# Altium PCB Using xSignals in a High-Speed Design with Diff Pair.PcbDoc
Units mm, origin at the board's own origin, x right, y up, seen from the top; angles counter-clockwise.
Board outline 63.5 x 50.8 mm, 4 copper layers (Top Layer, Internal Plane 1, Mid-Layer 2, Bottom Layer), stack 1.57 mm thick; 9 components, 11 nets, 56 pads, 6 vias.
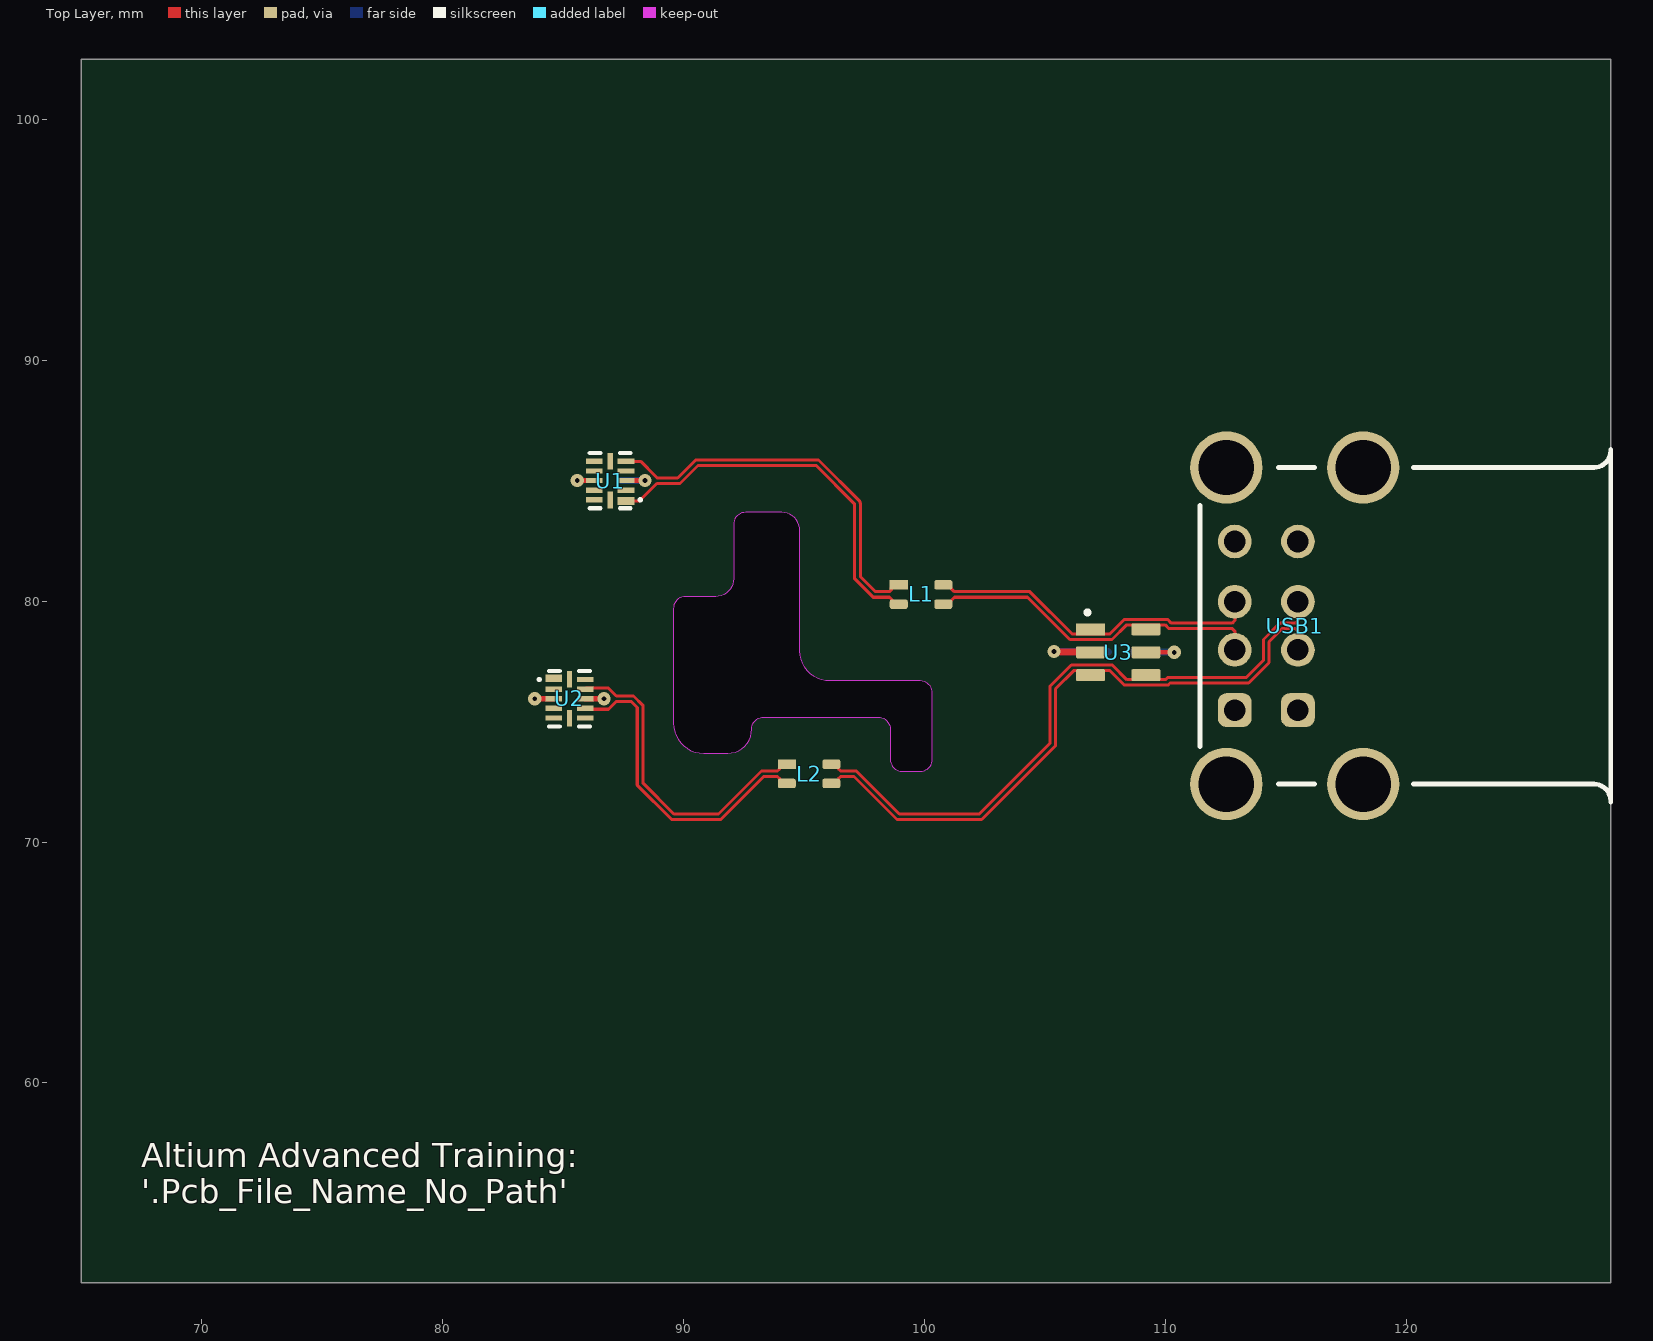
[diagram p0: Top Layer view]
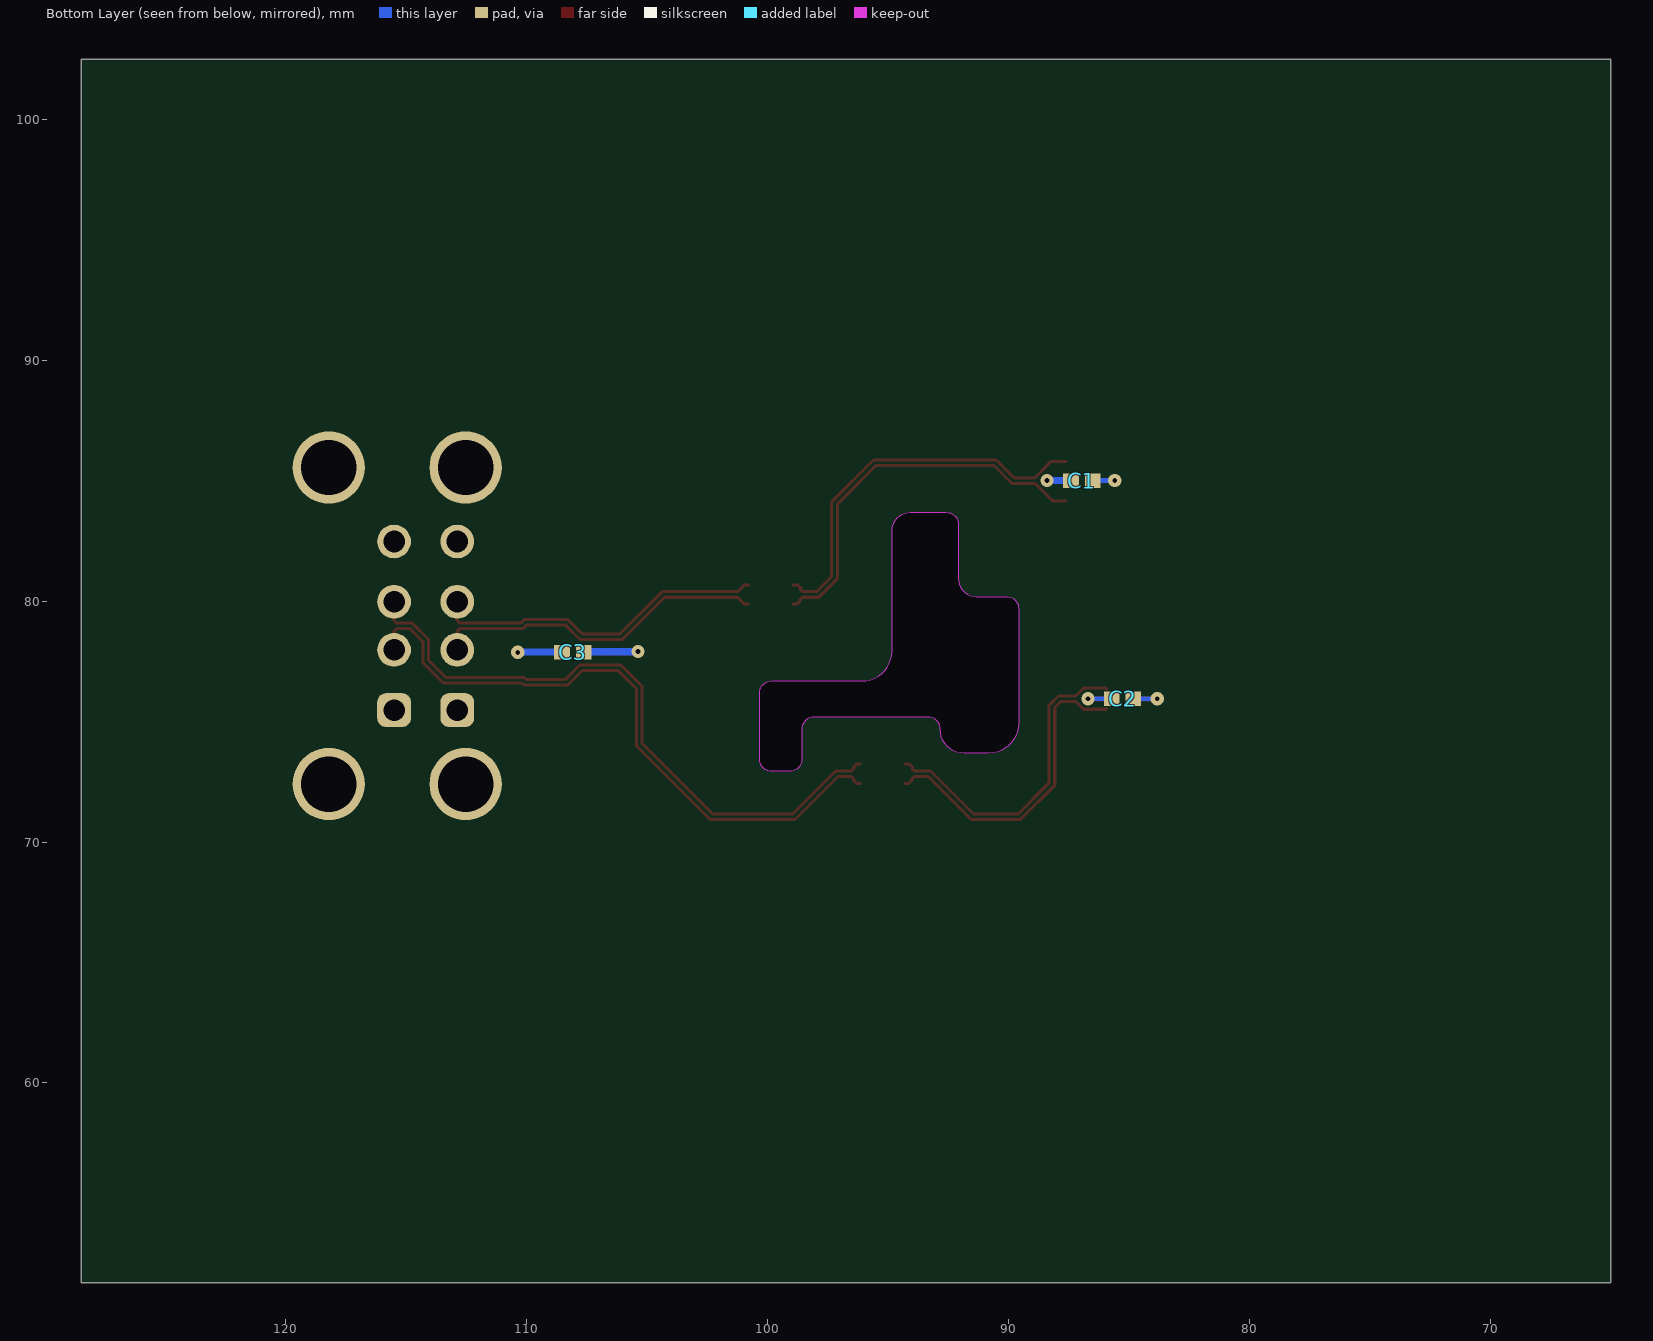
[diagram p1: Bottom Layer view, seen from below]
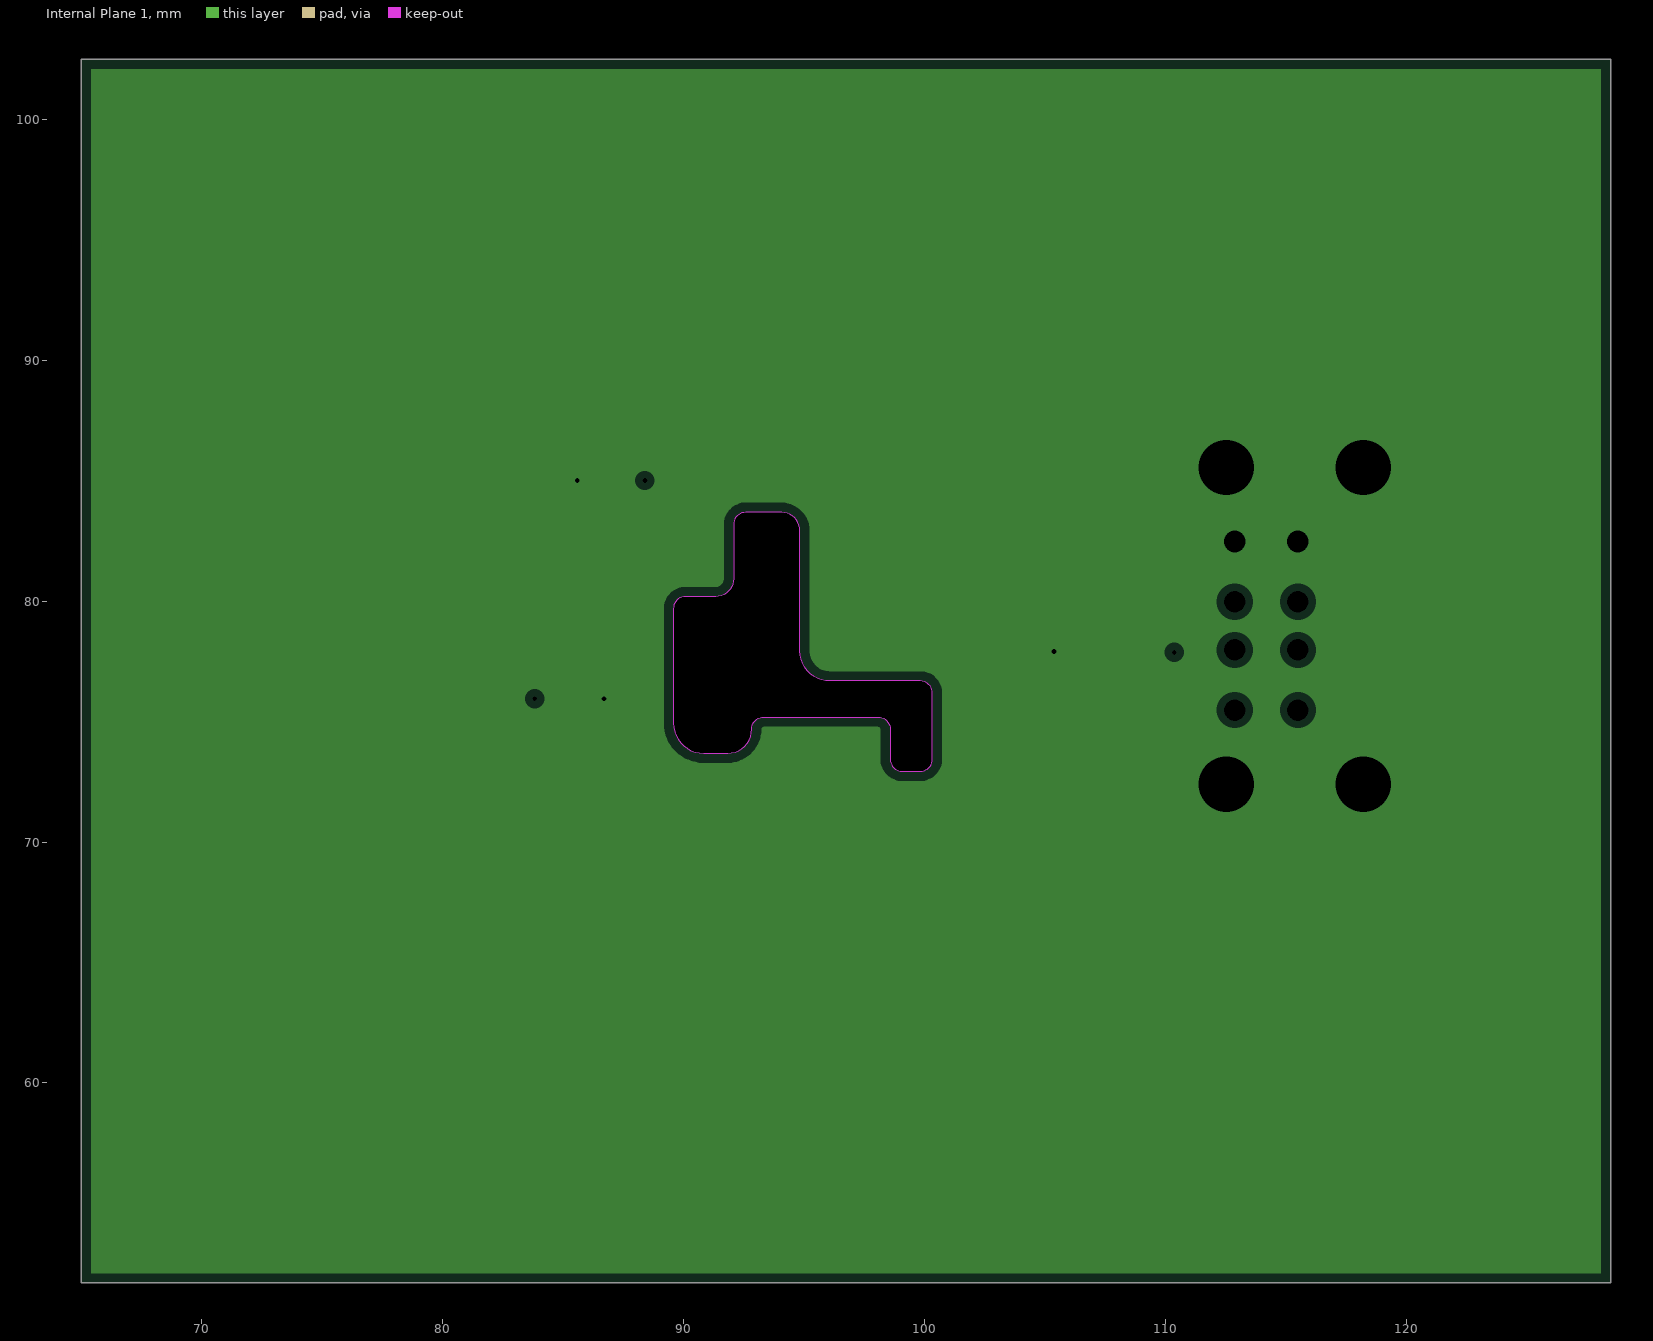
[diagram p2: Internal Plane 1, clearances drawn from the general rule]
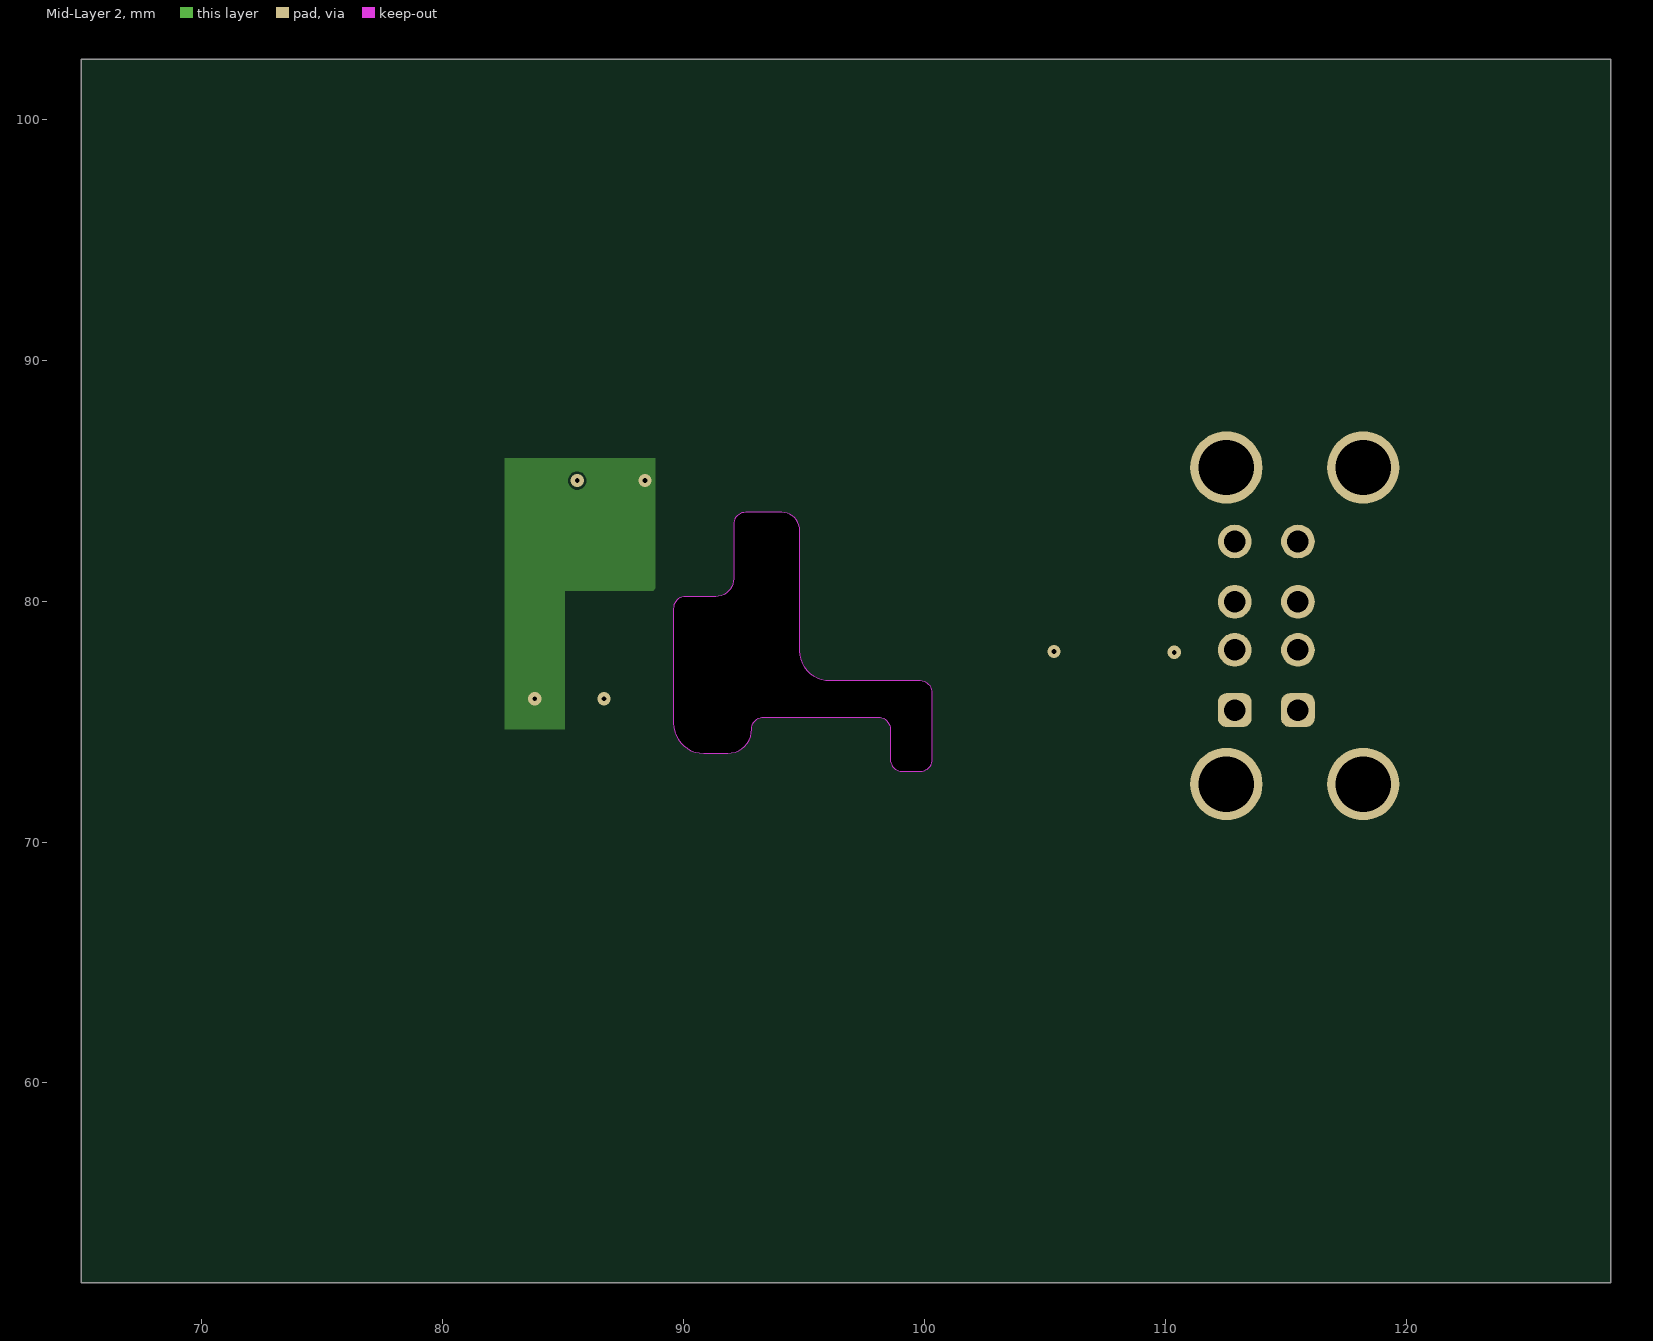
[diagram p3: Mid-Layer 2]

## Layer stack, top to bottom
Top Solder: solder mask 0.02, Solder Resist, Dk 2.5
Top Layer: signal copper 0.044
Dielectric  1: core 0.108, FR-4 (1 x 2116), Dk 3.6
Internal Plane 1: plane copper 0.033, net GND
Dielectric 2: prepreg 1.2, FR-4, Dk 4.2
Mid-Layer 2: signal copper 0.033
Dielectric  3: core 0.108, FR-4 (1 x 2116), Dk 3.6
Bottom Layer: signal copper 0.044
Bottom Solder: solder mask 0.02, Solder Resist, Dk 2.5

## Board outline
65,51.7 128.5,51.7 128.5,102.5 65,102.5
cut-out: 92.585,83.687 ccw(c92.585,83.187) 92.085,83.187 92.085,80.937 cw(c91.335,80.937) 91.335,80.187 90.085,80.187 ccw(c90.085,79.687) 89.585,79.687 89.585,74.937 ccw(c90.835,74.937) 90.835,73.687 91.835,73.687 ccw(c91.835,74.687) 92.835,74.687 cw(c93.335,74.687) 93.335,75.187 98.085,75.187 cw(c98.085,74.687) 98.585,74.687 98.585,73.437 ccw(c99.085,73.437) 99.085,72.937 99.835,72.937 ccw(c99.835,73.437) 100.335,73.437 100.335,76.187 ccw(c99.835,76.187) 99.835,76.687 96.085,76.687 cw(c96.085,77.937) 94.835,77.937 94.835,82.937 ccw(c94.085,82.937) 94.085,83.687

## Design rules (kind name [scope] priority, off if disabled: settings)
Clearance Clearance_DDR_GND_Polygons [IsRegion AND InNet ('GND') vs (IsRegion Or IsTrack or IsArc or IsVia) AND (InNetClass('DDR_ALL'))] p1: gap=0.508 ignorepadtopadclearanceinfootprint=FALSE except(0: Arc-Hole Track-Hole SMDPad-Hole THPad-Hole Via-Hole Fill-Hole Poly-Hole Region-Hole Text-Hole)
Clearance "Clearance_DiffPair Separation_GND planes" [(InDifferentialPairClass('All Differential Pairs')) and (not IsVia) vs IsRegion AND InNET('GND')] p2: gap=0.508 ignorepadtopadclearanceinfootprint=FALSE except(0: Arc-Hole Track-Hole SMDPad-Hole THPad-Hole Via-Hole Fill-Hole Poly-Hole Region-Hole Text-Hole)
Clearance Clearance_Keep_Out [OnLayer('Keep-Out Layer')] p3: gap=0.5 ignorepadtopadclearanceinfootprint=FALSE except(0: Arc-Hole Track-Hole SMDPad-Hole THPad-Hole Via-Hole Fill-Hole Poly-Hole Region-Hole Text-Hole)
Clearance Clearance_Fiducials [HasFootprint('FIDUCIAL_0.8MM')] p4: gap=0.4 ignorepadtopadclearanceinfootprint=FALSE except(0: Arc-Hole Track-Hole SMDPad-Hole THPad-Hole Via-Hole Fill-Hole Poly-Hole Region-Hole Text-Hole)
Clearance "Clearance_DiffPair Separation" [(InDifferentialPairClass('All Differential Pairs'))] p5: gap=0.38 ignorepadtopadclearanceinfootprint=FALSE except(0: Arc-Hole Track-Hole SMDPad-Hole THPad-Hole Via-Hole Fill-Hole Poly-Hole Region-Hole Text-Hole)
Clearance Clearance_NPTH [(ObjectKind = 'Pad') And (Layer = 'MultiLayer') And (Net = 'No Net') And (PadIsPlated = 'False')] p6: gap=0.3 ignorepadtopadclearanceinfootprint=FALSE except(0: Arc-Hole Track-Hole SMDPad-Hole THPad-Hole Via-Hole Fill-Hole Poly-Hole Region-Hole Text-Hole) // This is all the NPTH
Clearance Clearance_Polys [IsRegion vs IsRegion Or IsTrack or IsArc or IsPad or IsFill] p7: gap=0.2 ignorepadtopadclearanceinfootprint=FALSE except(0: Arc-Hole Track-Hole SMDPad-Hole THPad-Hole Via-Hole Fill-Hole Poly-Hole Region-Hole Text-Hole)
Clearance Clearance_Pads_DPs [(InDifferentialPairClass('All Differential Pairs')) vs (IsPad AND HasFootprint('UQFN12')) or (IsPad AND HasFootprint('ACM2012')) or (IsPad AND HasFootprint('DISPLAYPORT_SOCKET_MOLEX')) or (IsPad AND HasFootprint('QFN50P300X300X50-16N'))or (IsPad AND HasFootprint('CC0402')) or (IsPad AND HasFootprint('RC0402')) or (IsPad AND HasFootprint('SSOP28')) or (IsPad AND HasFootprint('SOT23-6L')) or (IsPad AND HasFootprint('SOCKET-BGA400-SG-BGA-6052'))] p8: gap=0.1 ignorepadtopadclearanceinfootprint=FALSE except(0: Arc-Hole Track-Hole SMDPad-Hole THPad-Hole Via-Hole Fill-Hole Poly-Hole Region-Hole Text-Hole)
Clearance Clearance_1 [All] p9: gap=0.1 ignorepadtopadclearanceinfootprint=FALSE except(0: Arc-Hole Track-Hole SMDPad-Hole THPad-Hole Via-Hole Fill-Hole Poly-Hole Region-Hole Text-Hole)
Clearance "Clearance same net" [All vs IsVia Or IsPad] p10 off: gap=0.1 ignorepadtopadclearanceinfootprint=FALSE except(0: Arc-Hole Track-Hole SMDPad-Hole THPad-Hole Via-Hole Fill-Hole Poly-Hole Region-Hole Text-Hole)
ComponentClearance ComponentClearance_TP [HasFootprint('TESTPAD_1270um') vs HasFootprint('TESTPAD_1270um')] p1: gap=0.64 collisioncheckmode=3 verticalgap=4 showdistances=FALSE // Based on 1.91mm between centres on the RA2R coda systems receptacle and test probes (PA2 series)
ComponentClearance ComponentClearance_RJ45 [(ObjectKind = 'Component') And (Footprint = 'RJ45_TRJG16368CNL') vs (ObjectKind = 'Component') And (Footprint = 'SFP_CAGE_SINGLE_Rev2')] p2: gap=0 collisioncheckmode=3 verticalgap=0 showdistances=FALSE
ComponentClearance [All] p3: gap=0.2 collisioncheckmode=3 verticalgap=0.2 showdistances=FALSE
DiffPairsRouting DiffPairsRouting_90R [InDifferentialPairClass('USB')] p1: maxlimit=0.127 minlimit=0.102 mostfreqgap=0.127 toplayer_maxgap=0.102 toplayer_prefgap=0.102 toplayer_minwidth=0.127 toplayer_maxwidth=0.127 toplayer_prefwidth=0.127 midlayer2_mingap=0.127 midlayer2_minwidth=0.097 midlayer2_maxwidth=0.097 midlayer2_prefwidth=0.097 bottomlayer_maxgap=0.102 bottomlayer_prefgap=0.102 bottomlayer_minwidth=0.127 bottomlayer_maxwidth=0.127 bottomlayer_prefwidth=0.127 impedanceprofiledriven=TRUE impedanceprofileid={3A565A69-9CC7-4088-950E-674C5BDB7BBF} impedanceprofilevalue=90.000000 maxuncoupledlength=20
HoleSize [All] p1: absolutevalues=TRUE maxlimit=3.2 minlimit=0.15 maxpercent=80.000 minpercent=20.000
HoleToHoleClearance HoleToHoleVia0.45mm [(ObjectKind = 'Via') AND (AsMM(ViaDiameter) = 0.45) AND (AsMM(HoleDiameter) = 0.2)] p1: gap=0.35 allowstackedmicrovias=FALSE
HoleToHoleClearance "HoleToHoleVia 0.55mm" [(ObjectKind = 'Via') AND (AsMM(ViaDiameter) = 0.55) AND (AsMM(HoleDiameter) = 0.25)] p2: gap=0.4 allowstackedmicrovias=FALSE
HoleToHoleClearance "HoleToHoleVia 0.406" [(ObjectKind = 'Via') AND (AsMM(ViaDiameter) = 0.406) AND (AsMM(HoleDiameter) = 0.20)] p3: gap=0.306 allowstackedmicrovias=FALSE
HoleToHoleClearance [All] p4: gap=0.254 allowstackedmicrovias=TRUE
MatchedLengths MatchedLengths_GROUP [InxSignalClass('USB_All')] p1: tolerance=1 checknetsindiffpair=FALSE checkdiffpairvsdiffpair=TRUE checkxsignals=TRUE checkothers=TRUE
MatchedLengths "MatchedLengths _All _Diff_Pairs" [InxSignalClass('USB_All')] p2: tolerance=0.1 checknetsindiffpair=TRUE checkdiffpairvsdiffpair=FALSE checkxsignals=FALSE checkothers=FALSE
MatchedLengths "Schematic Matched Net Lengths" [InNetClass('90R_DIFF')] p3: tolerance=0.1 checknetsindiffpair=TRUE checkdiffpairvsdiffpair=FALSE checkxsignals=FALSE checkothers=FALSE
MinimumAnnularRing MinimumAnnularRing_1 [All] p1 off: minimumring=0.124
MinimumAnnularRing [All] p2 off: minimumring=0.175
MinimumSolderMaskSliver "MinimumSolderMaskSliver_Text to pads" [IsPad vs IsText] p1: minsoldermaskwidth=0.07
MinimumSolderMaskSliver MinimumSolderMaskSliver_Vias [All vs IsVIA] p2: minsoldermaskwidth=0.07
MinimumSolderMaskSliver [All] p3 off: minsoldermaskwidth=0.07
PlaneClearance PlaneClearance_1 [(ObjectKind = 'Pad') And (Layer = 'MultiLayer') And (Net = 'No Net') And (PadIsPlated = 'False')] p1: clearance=0.3
PlaneClearance [All] p2: clearance=0.3 // Email ChrisM for Wurth 07-07-2014 300um min (or 275 if not poss) - was 225 before
PlaneConnect "PlaneConnect on SFP age with islated copper" [(InComponent('CAGE1') AND ((ObjectKind = 'Pad') And (Rotation = '0.001')))] p1: planeconnectstyle=Direct reliefexpansion=0.508 reliefentries=4 reliefconductorwidth=0.254 reliefairgap=0.254
PlaneConnect PlaneConnect_VIAs [IsVia] p2: planeconnectstyle=Direct reliefexpansion=0.508 reliefentries=4 reliefconductorwidth=0.254 reliefairgap=0.254
PlaneConnect PlaneConnect_1 [All] p3: planeconnectstyle=Relief reliefexpansion=0.5 reliefentries=4 reliefconductorwidth=0.25 reliefairgap=0.25
PolygonConnect PolygonConnect_Vias [IsVia] p1: connectstyle=Direct reliefconductorwidth=0.254 reliefentries=4 polygonreliefangle="90 Angle" airgapwidth=0.254
PolygonConnect [(ObjectKind = 'Pad') And (Layer = 'MultiLayer')] p2: connectstyle=Relief reliefconductorwidth=0.254 reliefentries=4 polygonreliefangle="90 Angle" airgapwidth=0.254
PolygonConnect PolygonConnect_1 [All] p3: connectstyle=Direct reliefconductorwidth=0.254 reliefentries=4 polygonreliefangle="90 Angle" airgapwidth=0.254
RoutingVias [All] p1: holewidth=0.2 width=0.45 viastyle="Through Hole" minholewidth=0.2 minwidth=0.406 maxholewidth=0.5 maxwidth=0.8
SilkToSilkClearance [All] p1 off: silktosilkclearance=0.1
SilkToSolderMaskClearance [IsPad] p1 off: minsilkscreentomaskgap=0.1 clearancetoexposedcopper=TRUE
SolderMaskExpansion "SolderMaskExpansion_IsVia 0.45mm" [(ObjectKind = 'Via') And (AsMM(ViaDiameter) = 0.45) And (AsMM(HoleDiameter) = 0.2)] p1: expansion=-0.125 istentingtop=FALSE // 0.45 pad size Vias with 0.2mm drill
SolderMaskExpansion "SolderMaskExpansion_IsVia 0.55mm" [(ObjectKind = 'Via') And (AsMM(ViaDiameter) = 0.55)  And (AsMM(HoleDiameter) = 0.25)] p2: expansion=-0.15 istentingtop=FALSE // 0.55 pad size Vias with 0.25mm drill
SolderMaskExpansion "SolderMaskExpansion_IsVia 0.55mm_0.2mmhole" [(ObjectKind = 'Via') And (AsMM(ViaDiameter) = 0.55)  And (AsMM(HoleDiameter) = 0.20)] p3: expansion=-0.175 istentingtop=FALSE // 0.55 pad size Vias with 0.25mm drill
SolderMaskExpansion SolderMaskExpansion_IsVia_0.406mm [(ObjectKind = 'Via') And (AsMM(ViaDiameter) = 0.406) And (AsMM(HoleDiameter) = 0.2)] p4: expansion=-0.103 istentingtop=FALSE // 0.45 pad size Vias with 0.2mm drill
SolderMaskExpansion [All] p5: expansion=0 istentingtop=FALSE // Need to set to 0 on Gerber generation (else 0.7mm is wurths rule)
SolderMaskExpansion SolderMaskExpansion_1 [All] p6: expansion=0.07 istentingtop=FALSE // Need to set to 0 on Gerber generation (else 0.7mm is wurths rule)
Width Width_90R_100R [InNetClass('100R_DIFF') OR InNetClass('90R_DIFF')] p1: maxlimit=0.127 minlimit=0.127 preferedwidth=0.127
Width [All] p2: maxlimit=3 minlimit=0.127 preferedwidth=0.2 minimp=0.000000 maximp=0.000000 favimp=0.000000
21 further rules are at their usual default settings.

## Classes and differential pairs
differential pair class USB: D1 D2 J_D1 J_D2
net class 90R_DIFF: D1_N D1_P D2_N D2_P J_D1_N J_D1_P J_D2_N J_D2_P
differential pair J_D2: +J_D2_P -J_D2_N
differential pair J_D1: +J_D1_P -J_D1_N
differential pair D2: +D2_P -D2_N
differential pair D1: +D1_P -D1_N

## Components (designator, comment, footprint, x,y, rotation, side; value= is the part's Value field where it differs from the comment)
C1 "100nF" CC0402 86.961,85.007 r0 bottom
C2 "100nF" CC0402 85.269,75.949 r180 bottom
C3 "100nF" CC0402 108.087,77.888 r180 bottom
L1 "90R@100MHz" ACM2012 99.865,80.278 r0 top
L2 "90R@100MHz" ACM2012 95.218,72.835 r0 top
U1 "NCN1154" UQFN12 86.961,85.007 r90 top
U2 "NCN1154" UQFN12 85.269,75.949 r270 top
U3 "DVIULC6-4SC6" SOT23-6L 106.9,78.828 r270 top
USB1 "DUAL USB" USB-A_RA_DUAL 128.5,78.978 r90 top

## Footprints (in the part's own frame and the unit in brackets; to place one, negate y for a bottom-side part, rotate by r counter-clockwise, add the part's x,y. Pads: shape width x height; smd on the part's side, far side on the other; paste and mask are expansions set on the pad)
ACM2012 [mm] "Common Mode Choke 0805 package"
  rect 0.75x0.4 smd: 1(-0.925,0.4)
  rrect50% 0.75x0.4 smd: 2(-0.925,-0.4) 3(0.925,-0.4) 4(0.925,0.4)
  body extent -1.1,-0.7 1.1,0.7, height 1.3
CC0402 [mm] "Standard 0402 Capacitor 0.5mm thick"
  rect 0.65x0.6 smd: 1(-0.45,0) 2(0.45,0)
  body extent -0.53,-0.28 0.53,0.28, height 0.51
SOT23-6L [mm]
  rect 0.5x1.2 smd: 1(0,0)
  rrect25% 0.5x1.2 smd: 2(0.95,0) 3(1.9,0) 4(1.9,2.3) 5(0.95,2.3) 6(0,2.3)
  silkscreen extent -0.78,-0.2 -0.63,-0.05, body extent -0.58,-0.35 2.48,2.65, height 1.46
UQFN12 [mm] "UQFN12 1.7x2.0, 0.4P - CASE 523AE-01"
  rect 0.32x0.69 smd: 1(-0.85,-0.655)
  rect 0.22x0.69 smd: 2(-0.4,-0.655) 3(0,-0.655) 4(0.4,-0.655) 5(0.8,-0.655) 7(0.8,0.655) 8(0.4,0.655) 9(0,0.655) 10(-0.4,0.655) 11(-0.8,0.655)
  rect 0.69x0.22 smd: 6(0.805,0) 12(-0.805,0)
  silkscreen extent -1.15,-1.26 1.15,0.85, body extent -1,-0.85 1,0.85, height 0.56
USB-A_RA_DUAL [mm] "Dual Stacked USB Type A Connector"
  rrect50% 1.4x1.4 hole 0.9: 1B(-3.5,12.99) 1T(-3.5,15.61)
  round 1.4 hole 0.9: 2B(-1,12.99) 2T(-1,15.61) 3B(1,12.99) 3T(1,15.61) 4B(3.5,12.99) 4T(3.5,15.61)
  round 3 hole 2.3: 5B(-6.57,10.28) 5B(6.57,10.28) 5T(-6.57,15.96) 5T(6.57,15.96)
  silkscreen extent -7.32,0 7.32,17.05, body extent -7.38,0 7.38,17, height 2.05

## Part data
C1 C2 C3: library part CAP_100nF, "Cap, 100nF, X7R, 16V, ±10%, CC0402"
L1 L2: library part FILTER, "CMNCK, 90R@100MHz, 50V, 400mA, ACM2012"
U1 U2: library part USB_UART, "3:1 High-Speed USB /UART/Auido Mux"
U3: library part ESD_Protector, "4-chl Ultra-Low Capacitance ESD protector with TVS diode"
USB1: library part USB, "RoHS compliant or Toby - KUSB-AS2N-WHT or Toby - KUSB-AS2N-BLK or 2EUK - UBAR-08S or 2EUK (Oupiin) - 8968-A08CRW"

## Via types
v1: diameter 0.55, hole 0.2, Top Layer to Bottom Layer, 6 vias

## Nets (pads, with @x,y where several pads share a name; then routed paths per layer and width w, separated by ;. In a path a pad name is that pad's centre, name@x,y a point inside that pad or via, vN(x,y) a via of type N, cw(c..) or ccw(c..) an arc to the next point about the centre after c; other vN are vias at no path point)
3v3_SB: C1.2 C2.2 U1.3 U2.3 | length 3.6
  Top Layer w0.2: U1.3 87.617,85.009 88.4,85.009 v1(88.401,85.01)
  Top Layer w0.22: v1@83.831,75.949 U2.3
  Top Layer w0.3: v1(83.828,75.947) v1@83.831,75.949
  Bottom Layer w0.2: v1(83.828,75.947) 84.816,75.947 C2.2
  Bottom Layer w0.3: C1.2 v1@88.401,85.007
5v0_USB: C3.1 U3.5 | length 3
  Top Layer w0.2: U3.5 109.201,77.877 v1(110.379,77.876) v1(110.379,77.876)
  Bottom Layer w0.3: C3.1 v1@110.379,77.888
D1_N: L1.2 U1.1 | length 16.2
  Top Layer w0.127: U1.1 88.168,84.157 88.895,84.884 89.855,84.884 90.604,85.633 95.514,85.633 97.096,84.051 97.096,80.95 97.882,80.164 98.554,80.164 98.651,80.067 98.651,80.012 98.784,79.878 L1.2
D1_P: L1.1 U1.5 | length 16.2
  Top Layer w0.127: U1.5 88.224,85.807 88.839,85.192 88.839,85.187 88.914,85.113 89.76,85.113 90.509,85.862 95.609,85.862 97.325,84.146 97.325,84.097 97.344,84.078 97.344,81.026 97.977,80.393 98.554,80.393 98.628,80.467 98.628,80.542 98.765,80.678 L1.1
D2_N: L2.2 U2.8 | length 13.3
  Top Layer w0.127: U2.8 85.96,75.513 86.891,75.513 87.212,75.835 87.835,75.835 88.085,75.585 88.085,72.363 89.511,70.937 91.552,70.937 93.335,72.72 93.907,72.72 94.004,72.623 94.004,72.569 94.137,72.435 L2.2
D2_P: L2.1 U2.10 | length 13.3
  Top Layer w0.127: U2.10 85.965,76.39 86.891,76.39 87.217,76.064 87.93,76.064 88.314,75.68 88.314,72.458 89.606,71.166 91.457,71.166 93.24,72.949 93.907,72.949 93.981,73.024 93.981,73.098 94.118,73.235 L2.1
GND: C1.1 C2.1 C3.2 U1.9 U2.9 U3.2 USB1.4B USB1.4T USB1.5B USB1.5T | length 8
  Top Layer w0.2: v1(85.591,85.005) 85.592,85.006 86.304,85.006 U1.9
  Top Layer w0.22: v1@85.523,85.007 U1.9 ; U2.9 v1@86.706,75.949
  Top Layer w0.3: v1@86.706,75.949 v1(86.709,75.952) ; v1(105.381,77.906) 105.394,77.892 106.886,77.892 U3.2
  Bottom Layer w0.2: v1(85.591,85.005) 86.508,85.005 C1.1 ; C2.1 85.721,75.952 v1(86.709,75.952)
  Bottom Layer w0.3: v1(105.381,77.906) 105.39,77.897 107.628,77.897 C3.2
J_D1_N: L1.3 U3.6 USB1.2T | length 14.1
  Top Layer w0.127: L1.3 100.965,79.878 101.251,80.164 104.286,80.164 106.042,78.408 107.749,78.408 107.75,78.409 107.795,78.409 108.404,79.018 109.2,79.018 110,79.018 110.16,78.858 112.79,78.858 112.89,78.758 USB1.2T
J_D1_P: L1.4 U3.1 USB1.3T | length 14.1
  Top Layer w0.127: L1.4 100.965,80.678 101.25,80.393 104.381,80.393 106.136,78.638 106.9,78.638 107.7,78.638 108.309,79.247 110.095,79.247 110.255,79.087 112.779,79.087 112.89,79.199 USB1.3T
J_D2_N: L2.3 U3.3 USB1.2B | length 26.8
  Top Layer w0.127: L2.3 96.298,72.435 96.432,72.569 96.432,72.623 96.529,72.72 97.085,72.72 98.868,70.937 102.382,70.937 105.443,73.999 105.443,76.363 106.199,77.118 106.9,77.118 107.71,77.118 108.315,76.513 110.109,76.513 110.2,76.604 113.466,76.604 114.31,77.448 114.31,78.314 114.854,78.858 115.41,78.858 115.51,78.758 USB1.2B
J_D2_P: L2.4 U3.4 USB1.3B | length 26.8
  Top Layer w0.127: L2.4 96.298,73.235 96.432,73.101 96.432,73.046 96.529,72.949 97.18,72.949 98.963,71.166 102.287,71.166 105.214,74.093 105.214,76.458 106.104,77.347 107.805,77.347 108.41,76.742 109.2,76.742 110.014,76.742 110.105,76.833 113.371,76.833 114.081,77.543 114.081,78.409 114.759,79.087 115.399,79.087 115.51,79.199 USB1.3B
pads on no net: U1.2 U1.4 U1.6 U1.7 U1.8 U1.10 U1.11 U1.12 U2.1 U2.2 U2.4 U2.5 U2.6 U2.7 U2.11 U2.12 USB1.1B USB1.1T

## Polygon pours and split planes (outlines as drawn)
3v3_SB on Mid-Layer 2 "3V3_SB_L03_P000" (solid, pour order 0): 88.835,85.937 88.835,80.437 85.085,80.437 85.085,74.687 82.585,74.687 82.585,83.187 82.585,85.937
GND on Internal Plane 1 (split plane): 128.098,52.102 65.402,52.102 65.402,102.098 128.098,102.098

## Silkscreen, mask and mechanical layers (free items; w line width, h text height)
Top Overlay:
  text "Altium Advanced Training:  / '.Pcb_File_Name_No_Path'" at 67.5,55 h1